# EAGLE board coronakiller_Zusatzplatine (EAGLE 9.6.2)
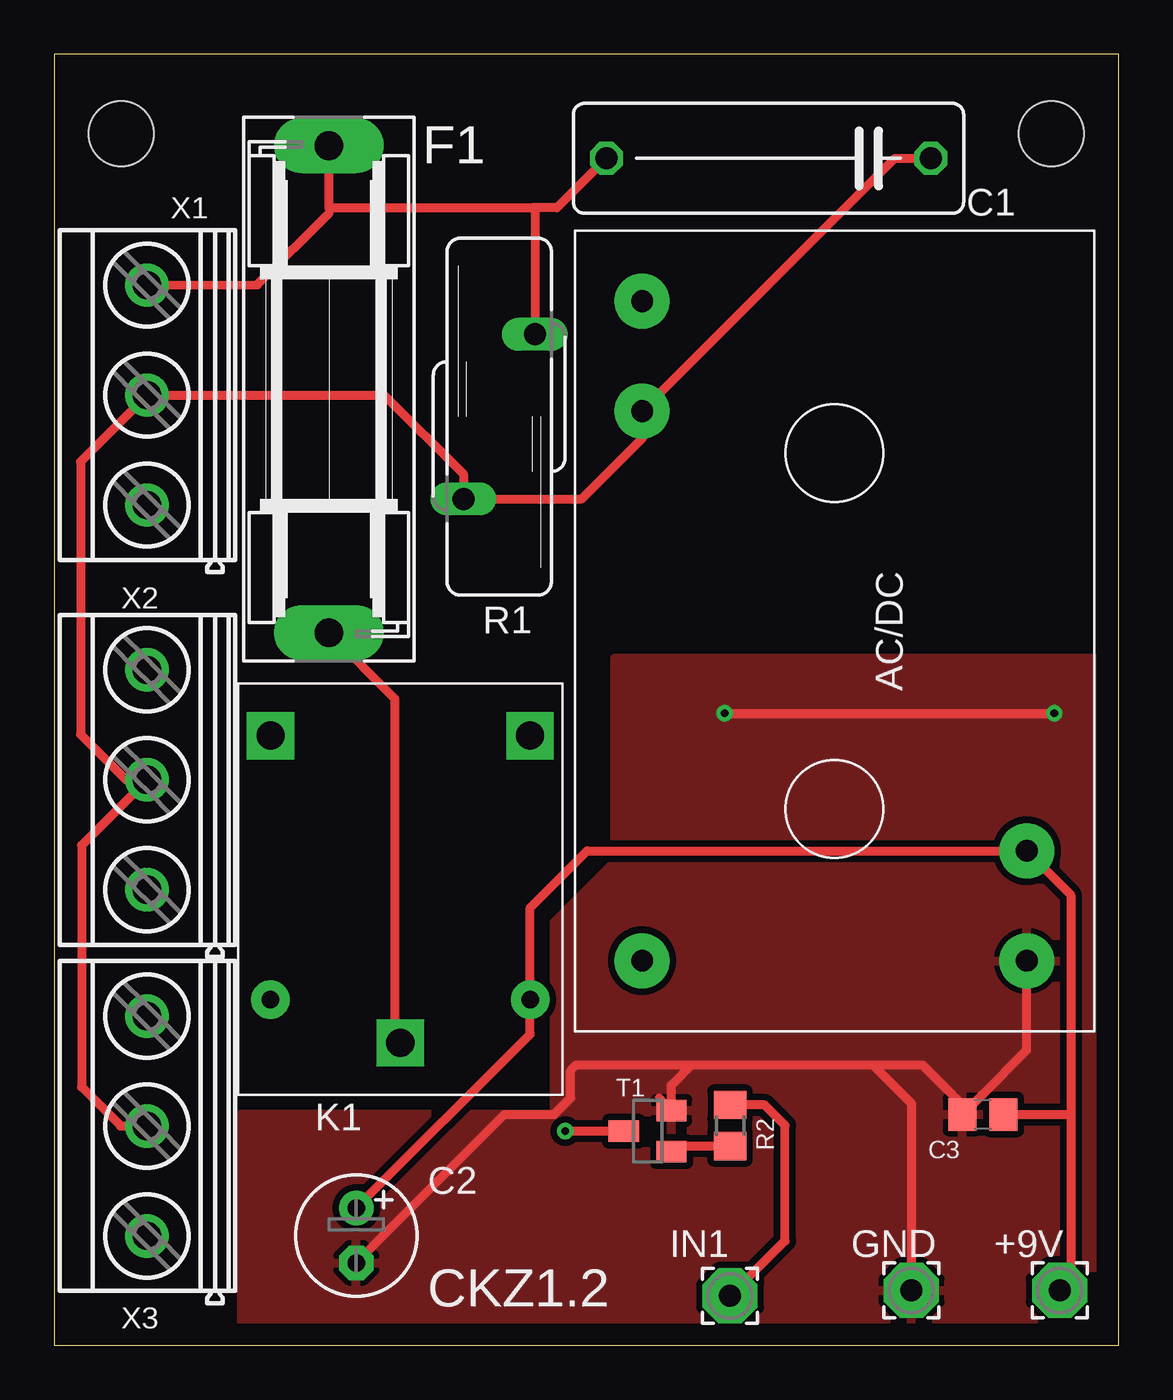
[diagram p0: board, top side]
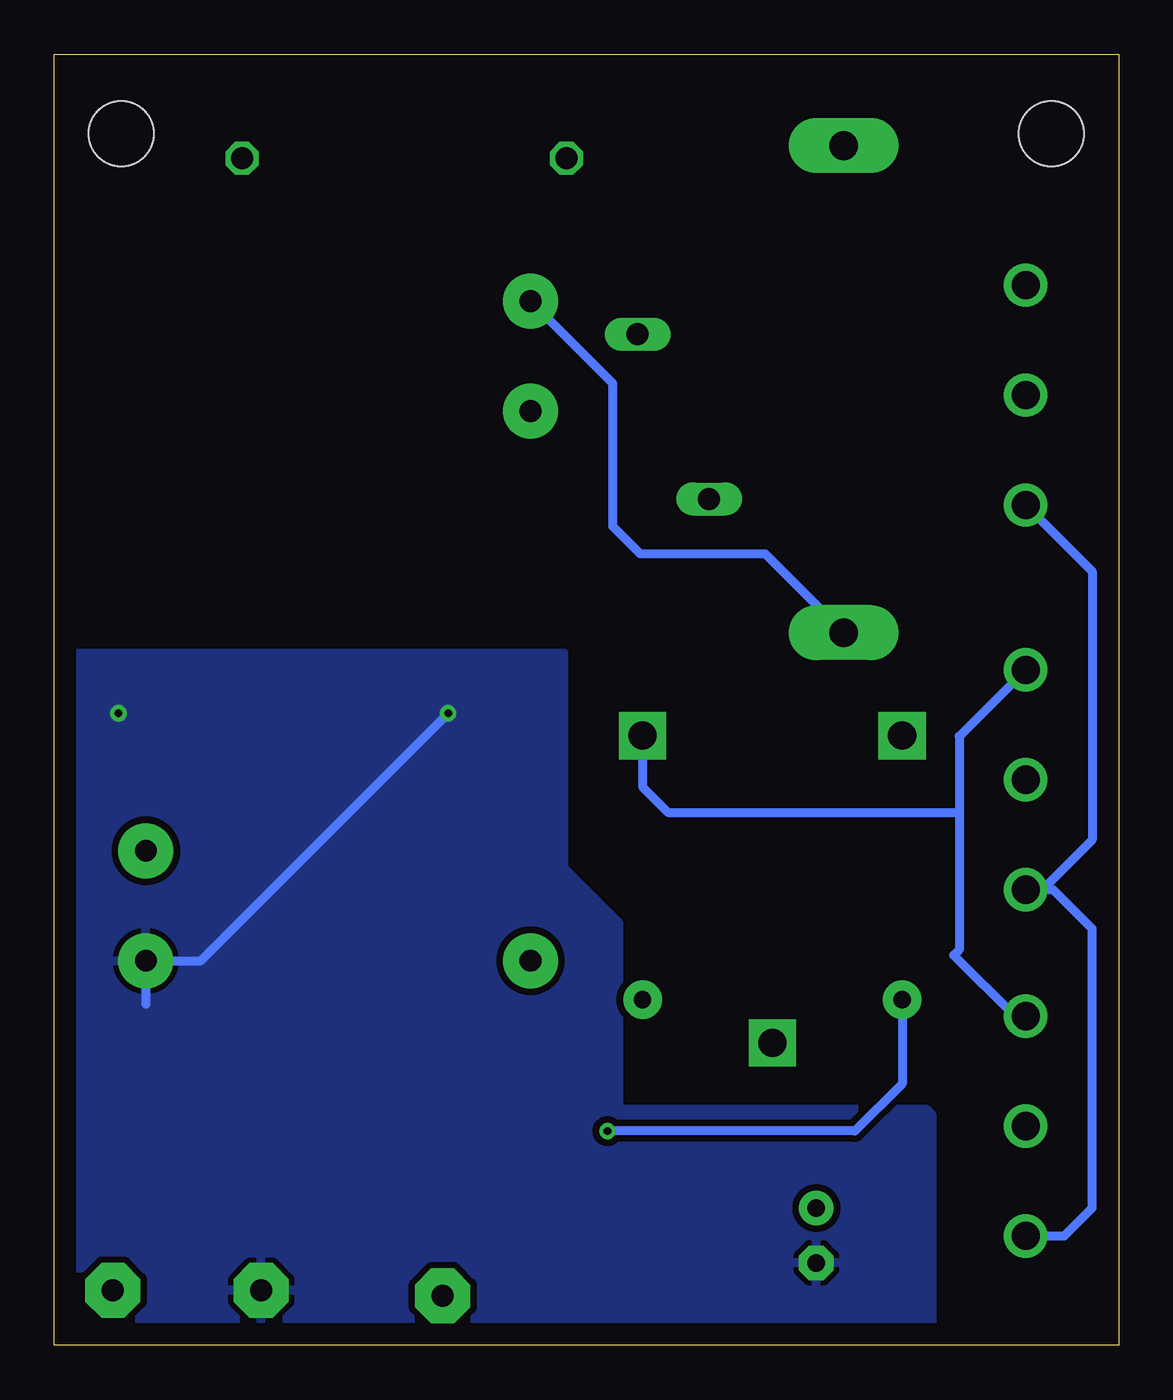
[diagram p1: board, bottom side, seen from below]

Size 49.2 x 59.68 mm. Coordinates in mm from the lower left corner, seen from the top.
Outline: 0,0 49.2,0 49.2,59.68 0,59.68 0,0
Copper layers (1*16): Top 0.035mm / dielectric 1.5mm / Bottom 0.035mm
Design rules "default *": minimum track width 6mil, minimum drill 0.35mm, track to track 12mil, track to pad 6mil, pad to pad 6mil, via to via 6mil, smd to smd 6mil, copper to edge 40mil, drill to drill 6mil, minimum pad ring 10mil, minimum via ring 8mil, stop-mask expansion 4mil, vias tented up to drill 0mil, thermal gap 10mil
Holes 3 mm at 3.1,56 46.1,56

## Footprints (pad centres in the part's own frame; a part is rotated, then mirrored left to right if it is on the bottom)
2,54/1,0 = drill 1.016 pad 2.54 octagon: 1 0,0
IRM_03 = drill 1 pad 2.54: AC/L -15.24,-8.89; AC/N -10.16,-8.89; NC 15.24,-8.89; V+ 10.16,8.89; V- 15.24,8.89
C150-054X183 = drill 1.016 octagon: 1 -7.493,0; 2 7.493,0
E2,5-6 = drill 0.813 pad 1.6: + -1.27,0 | drill 0.813 pad 1.6 octagon: - 1.27,0
C0805 = smd 1.3 x 1.5: 1 -0.95,0; 2 0.95,0
SH22,5 = drill 1.321 pad 2.54 long: 1 -11.252,0; 2 11.252,0
36.11 = drill 1.3 pad 2.184 square: 11 -7.1,0; 12 7.1,6; 14 7.1,-6 | drill 0.8 pad 1.778: A1 -5.1,-6; A2 -5.1,6
S14K275 = drill 1.016 long: 1 -1.651,-3.81; 2 1.651,3.81
R0805 = smd 1.3 x 1.5: 1 -0.95,0; 2 0.95,0
SOT23 = smd 1 x 1.4: 1 -0.95,-1.1; 2 0.95,-1.1; 3 0,1.1
MKDSN1,5/3-5,08 = drill 1.3 pad 2: 1 -7.641,0.025; 2 -2.561,0.025; 3 2.519,0.025

## Placement (x,y rotation side)
+9V  +9V  [2,54/1,0]  46.48,2.54 0 top
AC/DC  AC/DC  [IRM_03]  36.07,33.02 270 top
C1  330n  [C150-054X183]  33.02,54.86 180 top
C2  10µ  [E2,5-6]  13.97,5.08 270 top
C3  100n  [C0805]  42.93,10.67 180 top
F1  1,6A  [SH22,5]  12.7,44.2 270 top
GND  GND  [2,54/1,0]  39.62,2.54 0 top
IN1  IN1  [2,54/1,0]  31.24,2.29 0 top
K1  36.11  [36.11]  16,21.08 90 top
R1  S14K275  [S14K275]  20.57,42.93 180 top
R2  10K  [R0805]  31.24,10.16 90 top
T1  BC846  [SOT23]  27.43,9.91 90 top
X1  MKDSN1,5/3-5,08  [MKDSN1,5/3-5,08]  4.32,46.48 90 top
X2  MKDSN1,5/3-5,08  [MKDSN1,5/3-5,08]  4.32,28.7 90 top
X3  MKDSN1,5/3-5,08  [MKDSN1,5/3-5,08]  4.32,12.7 90 top

## Library data of the parts
+9V GND IN1 = wirepad
AC/DC = meanwell_irm_v6
C1-C3 = rcl; SPICEPREFIX: C
F1 = fuse; OC_FARNELL: unknown; OC_NEWARK: unknown
K1 = relay_finder_36_11
R1 = varistor
R2 = rcl; SPICEPREFIX: R
T1 = transistor-neu-to92
X1-X3 = con-phoenix-508

## Nets
GND: AC/DC.V- C2.- C3.2 GND.1 T1.2
N$1: AC/DC.AC/N C1.1 R1.2 X1.2 X2.2 X3.2
N$2: X1.1 X2.1 X3.1
N$3: C1.2 F1.1 R1.1 X1.3
N$4: AC/DC.AC/L F1.2 K1.11
N$5: K1.A2 T1.3
N$6: R2.1 T1.1
N$7: IN1.1 R2.2
N$8: K1.14 X2.3 X3.3
VCC: +9V.1 AC/DC.V+ C2.+ C3.1 K1.A1

## Tracks (layer width: path | path; a pad name or v marks a point on that pad's centre or on a via)
GND  (via drill 0.35)
  Top 0.406: v30.99,29.21 v46.23,29.21 | 27.96,11.43 T1.2 28.53,12.02 29.46,12.95 | 29.46,12.95 37.85,12.95 | 37.85,12.95 40.13,12.95 41.98,11.11 C3.2 42.87,11.56 44.96,13.65 AC/DC.V- | 37.85,12.95 39.62,11.18 GND.1 | C2.- 20.83,10.67 23.11,10.67 23.88,11.43 23.88,12.7 24.13,12.95 29.46,12.95
  Bottom 0.406: v30.99,29.21 42.42,17.78 AC/DC.V- 44.96,15.76 | v46.23,29.21 46.08,29.06
  pour Top: 8.64,10.67 8.64,0 49.28,0 49.28,31.75 25.91,31.75 25.91,22.35 23.11,19.56 23.11,10.67 8.89,10.67
  pour Bottom: 25.65,32 25.65,22.1 23.11,19.56 23.11,19.3 23.11,10.92 8.89,10.92 8.64,10.67 8.64,0.25 49.02,0.25 49.28,0 49.28,31.75 49.02,32
N$1
  Top 0.406: C1.1 38.86,54.86 AC/DC.AC/N 27.18,41.91 24.38,39.12 R1.2 18.92,40.26 15.24,43.94 15.22,43.92 X1.2 1.22,40.85 1.22,28.25 3.32,26.14 X2.2 1.27,23.12 1.27,11.94 3.07,10.14 X3.2
N$2
  Bottom 0.406: X3.1 2.51,5.06 1.22,6.35 1.22,19.25 3.03,21.06 X2.1 3.53,21.06 1.22,23.37 1.22,35.77 X1.1
N$3
  Top 0.305: 12.7,52.32 12.7,52.58 | 22.1,52.58 22.23,52.45
  Top 0.406: X1.3 9.39,49.02 12.7,52.32 | F1.1 12.7,52.58 22.1,52.58 23.24,52.58 C1.2 | 22.23,52.45 R1.1
N$4
  Top 0.406: K1.11 15.75,14.24 15.75,29.9 F1.2
  Bottom 0.406: F1.2 16.33,36.58 22.1,36.58 23.37,37.85 23.37,44.45 AC/DC.AC/L
N$5  (via drill 0.35)
  Top 0.406: T1.3 26.25,9.82 26.16,9.91 v23.62,9.91
  Bottom 0.406: K1.A2 10,12.1 12.19,9.91 v23.62,9.91
N$6
  Top 0.406: R2.1 28.79,9.21 T1.1
N$7
  Top 0.406: IN1.1 33.78,4.83 33.78,10.16 32.83,11.11 R2.2
N$8
  Bottom 0.406: X2.3 7.37,28.15 7.37,24.64 | X3.3 4.8,15.22 7.62,18.03 7.37,18.29 7.37,24.64 | K1.14 22,25.81 20.83,24.64 7.37,24.64
VCC
  Top 0.406: +9V.1 46.99,3.05 46.99,10.67 | 46.99,10.67 46.99,20.83 AC/DC.V+ 24.64,22.86 22,20.22 K1.A1 22,14.38 C2.+ | C3.1 46.99,10.67

## Text on the board
tNames: CKZ1.2